# Altium PCB External_GPS.PcbDoc
Units mm, origin at the board's own origin, x right, y up, seen from the top; angles counter-clockwise.
Board outline 77 x 70 mm, 2 copper layers (Top Layer, Bottom Layer); 33 components, 15 nets, 147 pads, 22 vias.
Unrouted connection lines stored in the file: 34.
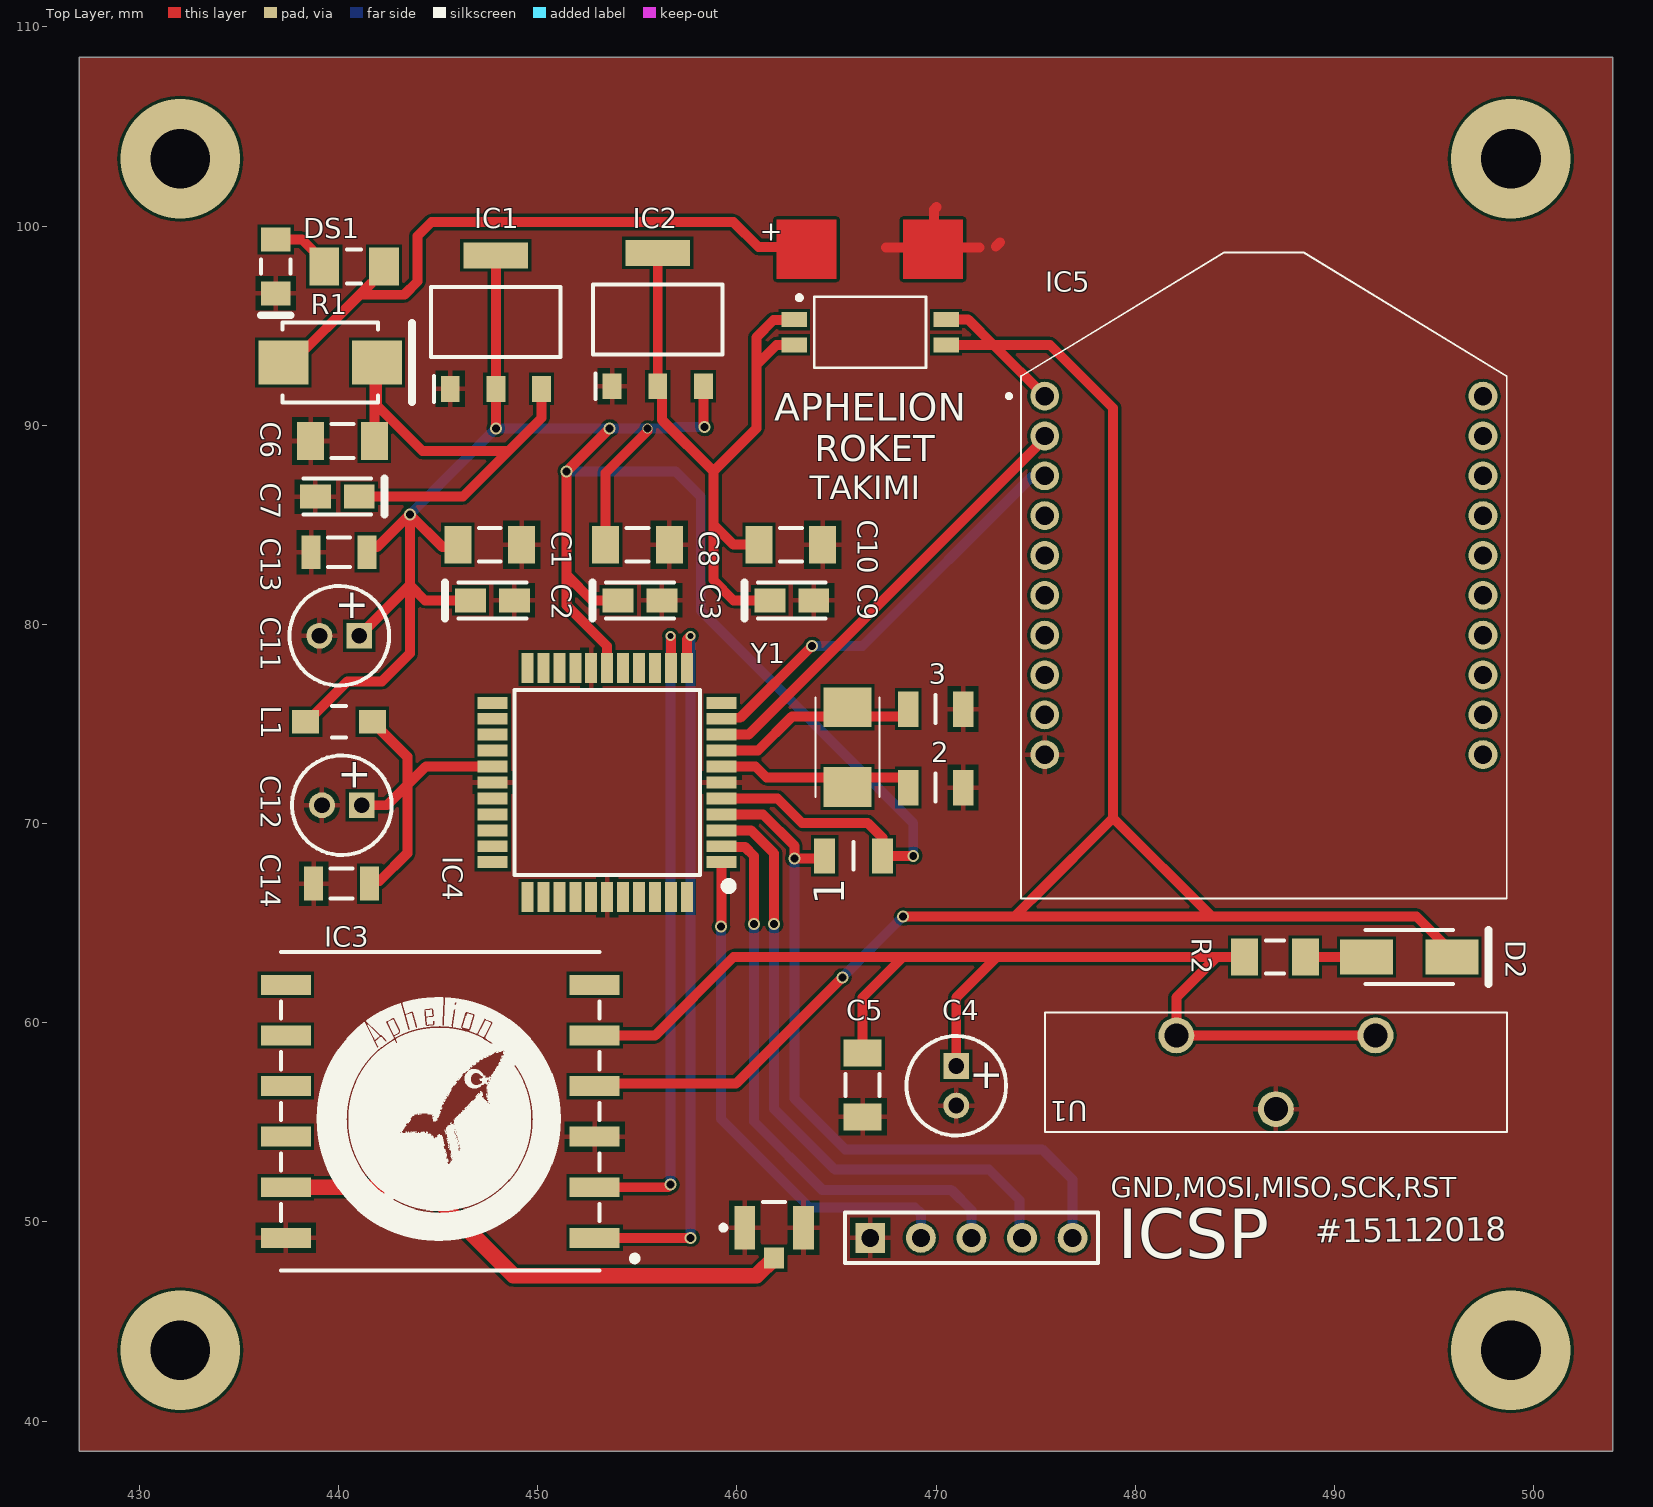
[diagram p0: Top Layer view]
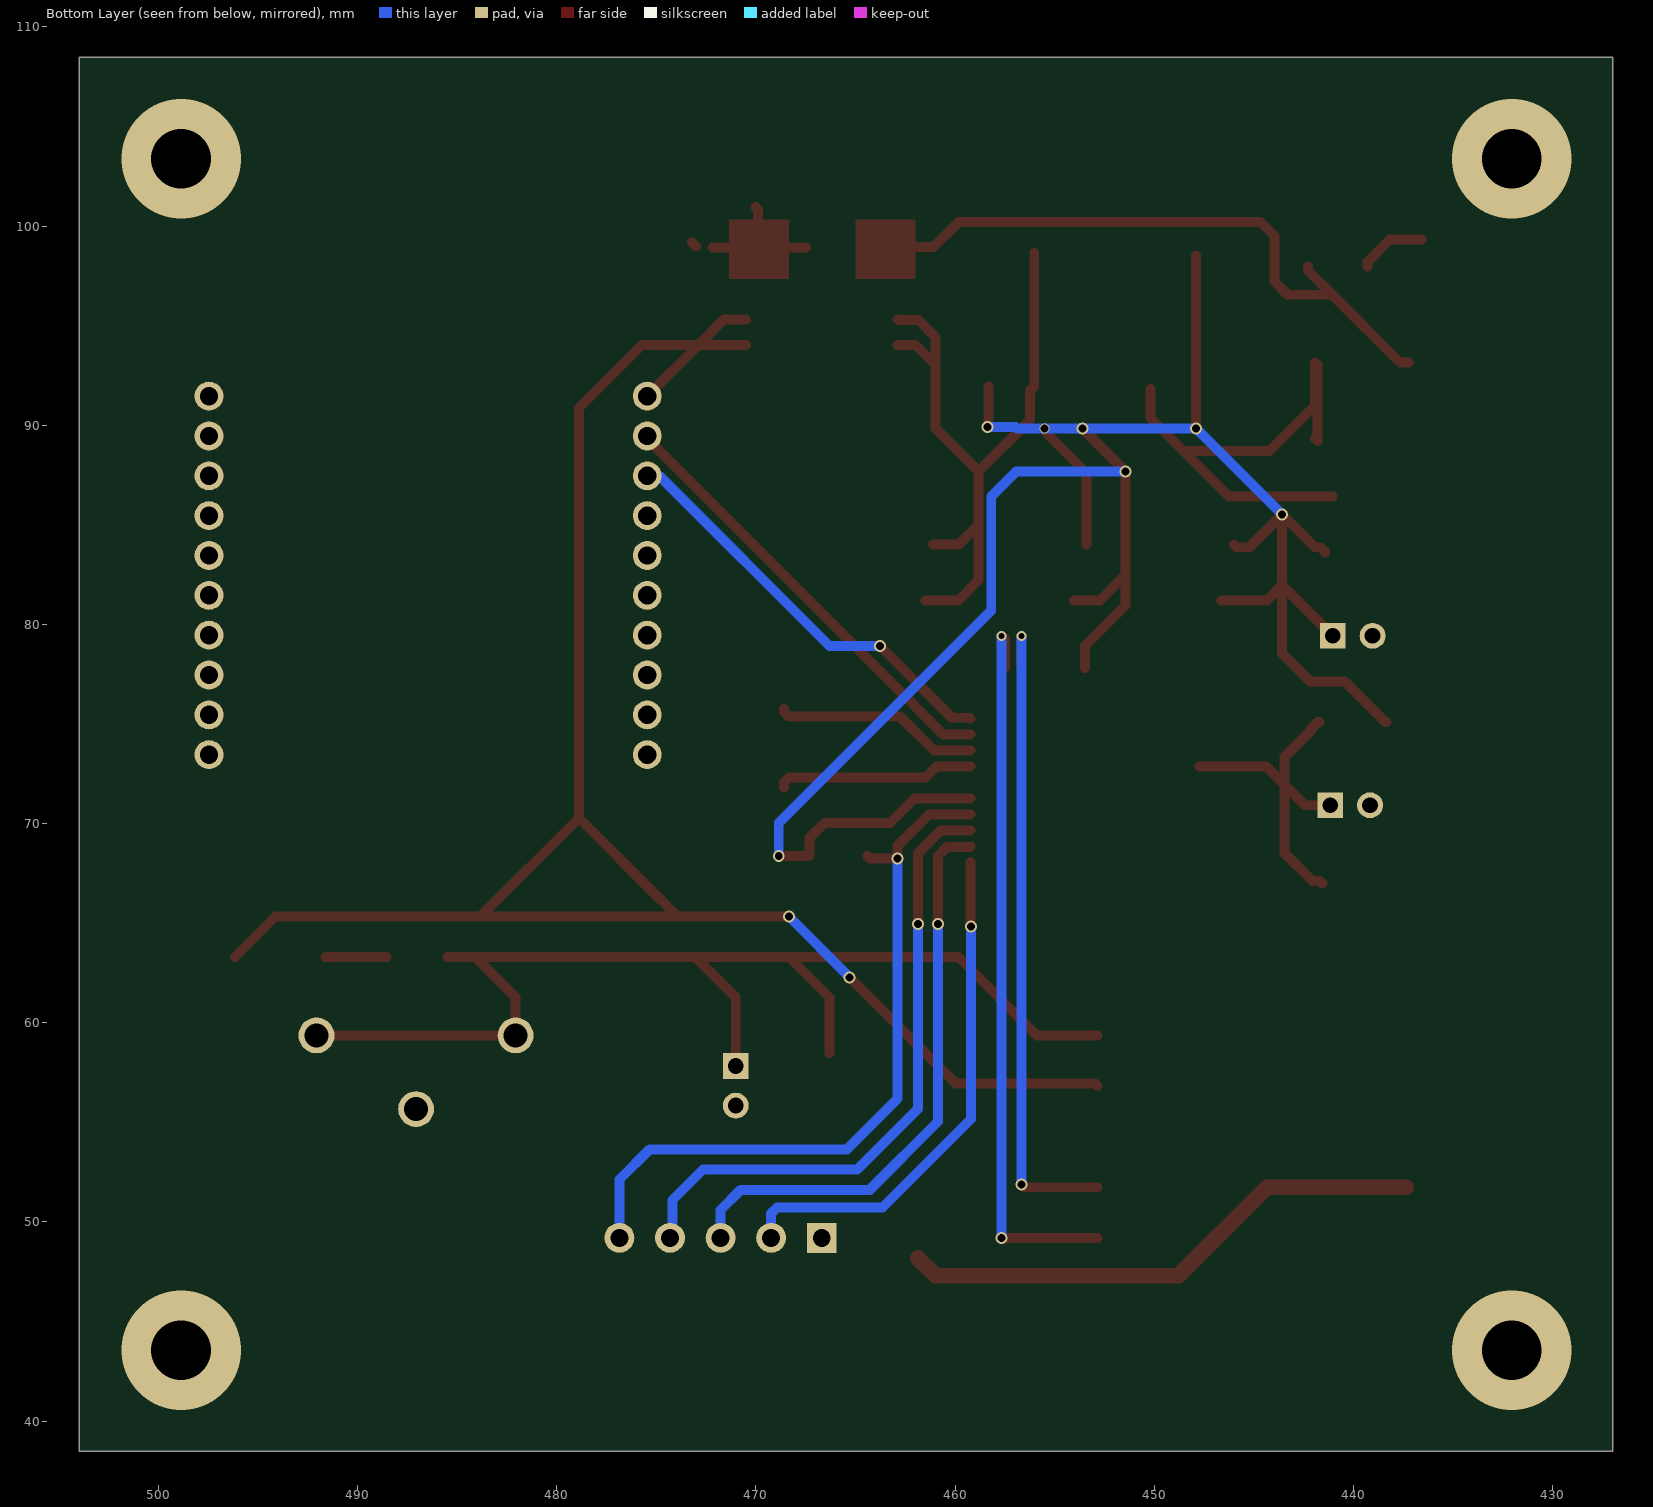
[diagram p1: Bottom Layer view, seen from below]
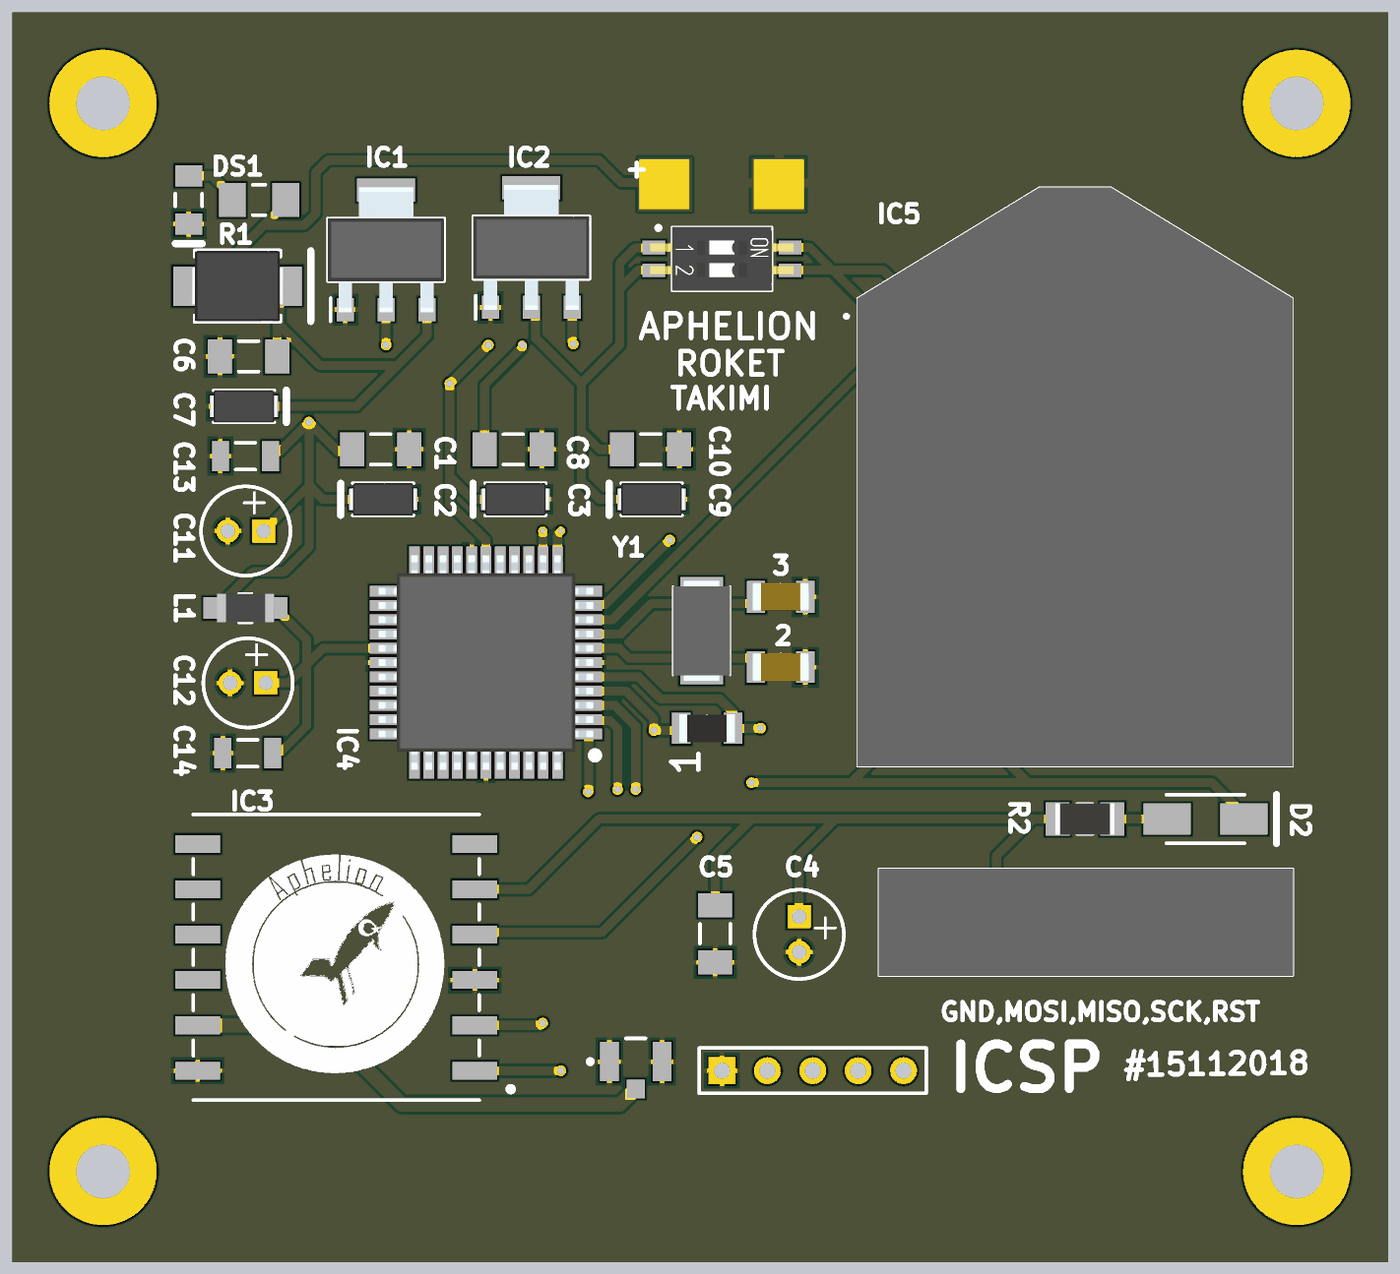
[diagram p2: 3D render of the assembled board from above, using the file's embedded part models]

## Layer stack, top to bottom
Top Solder: solder mask 0.0102, Solder Resist, Dk 3.5
Top Layer: signal copper 0.0356
Dielectric 1: dielectric 0.32, FR-4, Dk 4.8
Bottom Layer: signal copper 0.0356
Bottom Solder: solder mask 0.0102, Solder Resist, Dk 3.5

## Board outline
426.974,38.481 426.974,108.481 503.974,108.481 503.974,38.481

## Design rules (kind name [scope] priority, off if disabled: settings)
Clearance [All] p1: gap=0.15 ignorepadtopadclearanceinfootprint=FALSE
PolygonConnect [All] p1: connectstyle=Relief reliefconductorwidth=0.254 reliefentries=4 polygonreliefangle="90 Angle" airgapwidth=0.254
RoutingVias [All] p1: holewidth=0.711 width=1.27 viastyle="Through Hole" minholewidth=0.711 minwidth=1.27 maxholewidth=0.711 maxwidth=1.27
SolderMaskExpansion [All] p1: expansion=0.102 istentingtop=FALSE
Width [All] p1: maxlimit=50 minlimit=0.1 preferedwidth=0.254 minimp=50.000000 maximp=50.000000 favimp=50.000000
30 further rules are at their usual default settings.

## Classes and differential pairs
component class Sheet2: 1 2 3 C1 C2 C3 C4 C5 C6 C7 C8 C9 C10 C11 C12 C13 C14 D2 DS1 IC1 IC2 IC3 IC4 IC5 L1 R1 R2 U1 Y1

## Components (designator, comment, footprint, x,y, rotation, side; value= is the part's Value field where it differs from the comment)
1 "" RESC3116X65N 465.855,68.382 r180 top
2 "C17_22pF" CAPC3216X100N 469.976,71.811 r0 top
3 "C18_22pF" CAPC3216X100N 469.976,75.748 r0 top
C1 "100N" CAPC1206(3216)190_M 447.59,84.003 r0 top value=100nF
C2 "22uF" AVX-TAJ-A-2_L 447.725,81.209 r0 top
C3 "22uF" AVX-TAJ-A-2_L 455.134,81.209 r0 top
C4 "10uF" CAPPR55-200-1100X500X1200 471.009,56.841 r270 top
C5 "CAP 100nF" CAPC1206(3216)190_M 466.31,56.876 r90 top value=100nF
C6 "100N" CAPC1206(3216)190_M 440.199,89.21 r0 top value=100nF
C7 "22uF" AVX-TAJ-A-2_L 439.937,86.416 r180 top
C8 "100N" CAPC1206(3216)190_M 455.007,84.003 r180 top value=100nF
C9 "22uF" AVX-TAJ-A-2_L 462.754,81.209 r0 top
C10 "100N" CAPC1206(3216)190_M 462.703,84.003 r180 top value=100nF
C11 "10uF" CAPPR55-200-1100X500X1200 440.037,79.431 r180 top
C12 "10uF" CAPPR55-200-1100X500X1200 440.164,70.922 r180 top
C13 "100N" CAPC1206(3216)190_L 440.024,83.622 r0 top value=100nF
C14 "100N" CAPC1206(3216)190_L 440.151,66.985 r0 top value=100nF
D2 "SS14" FAIR-DO-214AC-2_V 493.751,63.302 r0 top
DS1 "1206_LED" LUMX-SML-LX1206YC-TR_V 436.846,97.973 r270 top
IC1 "AMS1117-5.0" SOT229P700X180-4N 447.895,95.179 r90 top
IC2 "ams1117-3.3v" SOT229P700X180-4N 456.023,95.306 r90 top
IC3 "L80-M39" L80-M39 437.354,60.635 r0 top
IC4 "ATMEGA32-16AU" QFP80P1200X1200X120-44N 453.483,72.065 r180 top
IC5 "XBP24CZ7WIT-004" XBP24CZ7WIT004 475.454,91.462 r0 top
L1 "742792111" SMD-1206 440.021,75.113 r0 top
R1 "10K" RESC3216X70X50ML20T25 440.783,97.973 r0 top
R2 "1K" RESC3216X60X45ML15T20 487.011,63.302 r0 top
U1 "KLS5-CR2032-04" KLS5CR203204 482.058,59.365 r0 top
Y1 "16MHZ" NX5032GA16MHZSTDCSK4 465.548,73.843 r270 top
? "Comment" HRS-U.FL-R-SMT-1(10)_V 461.865,49.714 r0 top
? "Comment" HDR1X5 466.691,49.205 r0 top
? "Comment" 416131160802 466.691,94.671 r270 top
? "Comment" FAIR-DO-214AA-2_V 439.577,93.147 r0 top

## Footprints (in the part's own frame and the unit in brackets; to place one, negate y for a bottom-side part, rotate by r counter-clockwise, add the part's x,y. Pads: shape width x height; smd on the part's side, far side on the other; paste and mask are expansions set on the pad)
416131160802 [mm] "02p, 1.27mm Pitch, Horizontal, HP Type, SMT, flat Actuator, black, with Tape, T&R"
  rect 0.76x1.27 smd: 1(-0.635,-3.81) 2(0.635,-3.81) 3(0.635,3.81) 4(-0.635,3.81)
  silkscreen extent -1.83,-3.66 1.79,2.8, body extent -1.79,-4 1.79,4, height 2.06
AVX-TAJ-A-2_L [mm] "Molded Capacitor, 2-Leads, Body 3.4x1.8mm, IPC High Density"
  rect 1.55x1.2 smd: 1(-1.1,0) 2(1.1,0)
  silkscreen extent -2.37,-0.9 1.7,0.9, body extent -1.92,-0.9 1.92,0.9, height 1.8
CAPC1206(3216)190_L [mm] "Chip Capacitor, Body 3.2x1.6mm, Height 1.9mm, IPC High Density"
  rect 0.95x1.7 smd: 1(-1.4,0) 2(1.4,0)
  silkscreen extent -0.55,-0.75 0.55,0.75, body extent -1.7,-0.9 1.7,0.9, height 1.9
CAPC1206(3216)190_M [mm] "Chip Capacitor, Body 3.2x1.6mm, Height 1.9mm, IPC Low Density"
  rect 1.35x1.9 smd: 1(-1.6,0) 2(1.6,0)
  silkscreen extent -0.55,-0.85 0.55,0.85, body extent -1.7,-0.9 1.7,0.9, height 1.9
CAPC3216X100N [mm]
  rect 1.02x1.78 smd: 1(-1.38,0) 2(1.38,0)
  silkscreen extent 0,-0.7 0,0.7, body extent -1.6,-0.8 1.6,0.8, height 1
CAPPR55-200-1100X500X1200 [mm] "THD, 2-Leads, Dia 5mm, Body Length 11mm"
  rect 1.3x1.3 hole 0.8: 1(-1,0)
  round 1.3 hole 0.8: 2(1,0)
  silkscreen extent -2.5,-2.5 2.5,2.5, body extent -2.5,-2.5 2.5,2.5, height 12
FAIR-DO-214AA-2_V [mm] "Molded Diode, 2-Leads, Body 4.75x3.95mm"
  rect 2.5x2.2 smd: 1(-2.35,0) 2(2.35,0)
  silkscreen extent -2.4,-2 4.1,2, body extent -2.59,-1.97 2.6,1.98, height 2.65
FAIR-DO-214AC-2_V [mm] "DO-214, 2-Leads, Body 4.375x2.725mm"
  rect 2.65x1.75 smd: 1(-2.15,0) 2(2.15,0)
  silkscreen extent -2.19,-1.36 3.98,1.36, body extent -2.19,-1.36 2.19,1.36, height 2.5
HDR1X5 [mm] "Connector; Header; 5 Position"
  rect 1.5x1.5 hole 0.9: 1(0,0)
  round 1.5 hole 0.9: 2(2.54,0) 3(5.08,0) 4(7.62,0) 5(10.16,0)
  silkscreen extent -1.27,-1.27 11.43,1.27
HRS-U.FL-R-SMT-1(10)_V [mm] "SMD, 3-Leads, Body 2.6x2.6mm"
  rect 1.05x2.2 smd: 1(-1.475,0) 2(1.475,0)
  rect 1x1.05 smd: 3(0,-1.525)
  silkscreen extent -2.67,-0.12 0.55,1.3, body extent -1.3,-1.3 1.3,1.3, height 1.25
KLS5CR203204 [mm]
  round 1.8 hole 1.2: 1(0,0) 2(10,0) 3(5,-3.7)
  silkscreen extent -6.6,-4.85 16.6,1.15, body extent -6.6,-4.85 16.6,1.15, height 18.13
L80-M39 [mm]
  rect 2.5x1 smd: 1(15.5,-11.43) 2(15.5,-8.89) 3(15.5,-6.35) 4(15.5,-3.81) 5(15.5,-1.27) 6(15.5,1.27) 7(0,1.27) 8(0,-1.27) 9(0,-3.81) 10(0,-6.35) 11(0,-8.89) 12(0,-11.43)
  silkscreen extent -0.25,-13.08 17.65,2.92
LUMX-SML-LX1206YC-TR_V [mm] "SMD, 2-Leads, Body 3.2x1.5mm"
  rect 1.2x1.5 smd: 1(-1.35,0) 2(1.35,0)
  silkscreen extent -0.35,-0.75 2.45,0.75, body extent -1.6,-0.75 1.6,0.75, height 1.25
NX5032GA16MHZSTDCSK4 [mm]
  rect 2x2.4 smd: 1(-2,0) 2(2,0)
  silkscreen extent -2.5,-1.6 2.5,1.6, body extent -2.8,-1.6 2.8,1.6, height 1.6
QFP80P1200X1200X120-44N [mm]
  rect 1.5x0.6 smd: 1(-5.75,4) 2(-5.75,3.2) 3(-5.75,2.4) 4(-5.75,1.6) 5(-5.75,0.8) 6(-5.75,0) 7(-5.75,-0.8) 8(-5.75,-1.6) 9(-5.75,-2.4) 10(-5.75,-3.2) 11(-5.75,-4) 23(5.75,-4) 24(5.75,-3.2) 25(5.75,-2.4) 26(5.75,-1.6) 27(5.75,-0.8) 28(5.75,0) 29(5.75,0.8) 30(5.75,1.6) 31(5.75,2.4) 32(5.75,3.2) 33(5.75,4)
  rect 0.6x1.5 smd: 12(-4,-5.75) 13(-3.2,-5.75) 14(-2.4,-5.75) 15(-1.6,-5.75) 16(-0.8,-5.75) 17(0,-5.75) 18(0.8,-5.75) 19(1.6,-5.75) 20(2.4,-5.75) 21(3.2,-5.75) 22(4,-5.75) 34(4,5.75) 35(3.2,5.75) 36(2.4,5.75) 37(1.6,5.75) 38(0.8,5.75) 39(0,5.75) 40(-0.8,5.75) 41(-1.6,5.75) 42(-2.4,5.75) 43(-3.2,5.75) 44(-4,5.75)
  silkscreen extent -6.3,-4.65 4.65,5.4, body extent -6,-6 6,6, height 1.2
RESC3116X65N [mm]
  rect 1.05x1.75 smd: 1(-1.45,0) 2(1.45,0)
  silkscreen extent 0,-0.69 0,0.69, body extent -1.55,-0.79 1.55,0.79, height 0.65
RESC3216X60X45ML15T20 [mm] "Chip Resistor, 2-Leads, Body 3.3x1.75mm, IPC Low Density"
  rect 1.35x1.85 smd: 1(-1.525,0) 2(1.525,0)
  silkscreen extent -0.45,-0.82 0.45,0.82, body extent -1.65,-0.87 1.65,0.87, height 0.6
RESC3216X70X50ML20T25 [mm] "Chip Resistor, 2-Leads, Body 3.20x1.60mm, IPC Low Density"
  rect 1.5x1.9 smd: 1(-1.5,0) 2(1.5,0)
  silkscreen extent -0.35,-0.85 0.35,0.85, body extent -1.7,-0.9 1.7,0.9, height 0.7
SMD-1206 [mm] "Chip Inductor, 2-Leads, Body 3.2x1.6mm"
  rect 1.35x1.2 smd: 1(-1.675,0) 2(1.675,0)
  silkscreen extent -0.35,-0.8 0.35,0.8, body extent -1.6,-0.8 1.6,0.8, height 1.09
SOT229P700X180-4N [mm]
  rect 1.3x0.95 smd: 1(-3.35,2.29) 2(-3.35,0) 3(-3.35,-2.29)
  rect 1.3x3.25 smd: 4(3.35,0)
  silkscreen extent -4,-3.25 1.75,3.25, body extent -3.5,-3.25 3.5,3.25, height 1.8
XBP24CZ7WIT004 [mm]
  round 1.45 hole 0.92: 1(0,0) 2(0,-2) 3(0,-4) 4(0,-6) 5(0,-8) 6(0,-10) 7(0,-12) 8(0,-14) 9(0,-16) 10(0,-18) 11(22,-18) 12(22,-16) 13(22,-14) 14(22,-12) 15(22,-10) 16(22,-8) 17(22,-6) 18(22,-4) 19(22,-2) 20(22,0)
  silkscreen extent -1.9,-25.21 23.19,7.21, body extent -1.19,-25.21 23.19,7.21, height 2.79

## Part data
1: library part MC1206S4F5600T5E, "Resistor", Manufacturer_Name=MULTICOMP, Datasheet Link=http://www.newark.com/pdfs/datasheets/spc/TA-677.pdf?_ga=1.248182791.1411154270.1472651675, Height=0.65mm, Manufacturer_Part_Number=MC1206S4F5600T5E
2 3: library part CL31B104KBCNNNC, "Capacitor", Manufacturer_Name="Samsung Electro-Mechanics", RS Part Number=7666947, Datasheet Link=http://www.samsungsem.com/kr/support/product-search/mlcc/CL31B104KBCNNNC.jsp, Height=1mm, Manufacturer_Part_Number=CL31B104KBCNNNC, RS Price/Stock=http://uk.rs-online.com/web/p/products/7666947
C1 C5 C6 C8 C10: library part CMP-1037-04189-1, "CAP 100nF 25V ±5% 1206 (3216 Metric) Thickness 1.9mm SMD", Case-EIA=1206, Case-Metric=3216, Rated Voltage="25 V", Tolerance=Â±5%, Max Thickness="1.9 mm", Technology=SMT
C2 C3 C7 C9: library part CMP-2000-07524-1, "Chip Capacitor, 22 uF, +/- 10%, 10 V, -55 to 125 degC, 1206 (3216 Metric), RoHS, Tape and Reel", Case Code (Metric)=3216, Case Code (Imperial)=1206, Dielectric Material=Tantalum, ESR (Equivalent Series Resistance)=3Ohm, Leakage Current=2.2uA, Manufacturer=AVX, Max Operating Temperature=125degC, Min Operating Temperature=-55degC, Package Description="2-Pin Surface Mount Device, Body 3.2 x 1.65 mm", Package Quantity=1, Package Reference=TAJ-A-2, Tolerance=10%, Voltage=10V, Capacitance=22uF, Case/Package=1206, Datasheet URL=http://datasheets.avx.com/TAJ.pdf, Datasheet Version=09/2017, Depth=1.6mm, Dissipation Factor=8%, Height=1.6mm, Height - Seated (Max)=0.071inch, Lead Free=LeadFree, Lead Pitch=1.1mm, Length=3.2mm, Manufacturer URL=http://www.avx.com/, Mount=PCB, Mounting Technology=SurfaceMount, Number of Pins=2, Packaging=TapeandReel, Polarity=Polar, Radiation Hardening=No, REACH SVHC=NoSVHC, RoHSCompliant=True, Termination=SMD/SMT, Voltage Rating=10V, Voltage Rating (DC)=10V, Width=1.6mm
C4 C11 C12: library part CMP-2100-03622-1, "Aluminum Electrolytic Capacitor, 10 uF, +/- 20%, 50 V, -40 to 85 degC, 2-Pin THD, RoHS, Bulk", Case/Package=Radial, Dielectric Material=Aluminium, Leakage Current=3uA, Manufacturer=Panasonic, Max Operating Temperature=85degC, Min Operating Temperature=-40degC, Package Description="2-Pin Radial Lead, Dia 5 mm, Height 12 mm", Package Quantity=200, Package Reference=CAPPR55-200-1100X500X1200, Ripple Current=65mA, Tolerance=20%, Voltage=50V, Capacitance=10uF, Datasheet URL=https://industrial.panasonic.com/cdbs/www-data/pdf/RDF0000/ABA0000C1218.pdf, Datasheet Version="Rev. 05, 10/2016", Diameter=5mm, Dissipation Factor=0.12%, Height=11mm, Height - Seated (Max)=0.472inch, Lead Diameter=0.5mm, Lead Free=LeadFree, Lead Pitch=2mm, Lead/Base Style=Straight, Length=11mm, Life (Hours)=2000Hour, Manufacturer URL=http://www.panasonic.com/, Mount=ThroughHole, Number of Pins=2, Packaging=Bulk, Radiation Hardening=No, REACH SVHC=NoSVHC, Ripple Current (AC)=65mA, RoHSCompliant=true, Termination=Radial, Voltage Rating=50V, Voltage Rating (DC)=50V
C13 C14: library part CMP-1037-04186-1, "CAP 100nF 25V ±1% 1206 (3216 Metric) Thickness 1.9mm SMD", Case-EIA=1206, Case-Metric=3216, Rated Voltage="25 V", Tolerance=Â±1%, Max Thickness="1.9 mm", Technology=SMT
D2: library part CMP-2000-04943-1, "Schottky Rectifier, 1.1 W, -65 to 125 degC, 2-Pin SMD, RoHS, Tape and Reel", Average Forward Current-Max (A)=1, Manufacturer=Fairchild, Package Body Material=PLASTIC/EPOXY, Package Description="2-Pin Surface Mount Device, Body 4.375 x 2.725 mm", Package Reference=DO-214AC-2, Package Shape=RECTANGULAR, Package Style=SMALLOUTLINE, Peak Reflow Temperature (Cel)=260, Power Dissipation Limit-Max (W)=1.1, Rep Pk Reverse Voltage-Max (V)=40, Additional Feature=FREEWHEELINGDIODE, CAGE Code=1HBD3,07933,59621,7D893, Configuration=SINGLE, Datasheet URL=http://www.onlinecomponents.com/datasheet/ss14.aspx?p=11369800, Datasheet Version=Oct-13, Diode Element Material=SILICON, JEDEC-95 Code=DO-214AC, JESD-30 Code=R-PDSO-C2, JESD-97 Code=e3, Lead Free=YES, Manufacturer URL=https://www.fairchildsemi.com/, Moisture Sensitivity Level=1, Number of Elements=1, Number of Terminals=2, Package URL=https://www.fairchildsemi.com/package-drawings/DO/DO214AC.pdf, RoHS Compliant=YES, Signal Diode Type=SIGNALDIODE, Surface Mount=YES, Technology=SCHOTTKY, Terminal Finish=MATTETIN, Terminal Form=CBEND, Terminal Position=DUAL
DS1: library part CMP-2000-07124-1, "Yellow LED, Water Clear Len, 585 nm, 2.1 V, -40 to 85 degC, 2-Pin SMD, RoHS, Tape and Reel", Color=Yellow, Current - Test=20mA, Lens Color=Colorless, Manufacturer=Lumex, Millicandela Rating=6mcd, Package / Case=1206(3216Metric), Package Description="2-Pin Surface Mount Device, Body 3.2 x 1.5 mm", Package Reference=SML-LX1206YC-TR, Standard Package=3,000, Supplier Device Package=1206, Voltage - Forward (Vf) (Typ)=2.1V, Catalog Drawings=SML-LX1206SeriesTopSML-LX1206SeriesSideSML-LX1206SeriesBottomSML-LX1206SeriesFootprint, Category=Optoelectronics, Datasheet URL=http://www.lumex.com/content/files/ProductAttachment/SML-LX1206YC-TR.pdf, Datasheet Version="Rev. K, 08/2012", Family=LEDIndication-Discrete, Features=-, Height (Max)=1.10mm, Lens Style/Size=RectanglewithFlatTop, Lens Transparency=Clear, Manufacturer URL=http://www.lumexinstruments.com/, Mounting Technology=SurfaceMount, Mounting Type=SurfaceMount, Online Catalog=SML-LX1206RectanglewithFlatTop1206PackageLEDs, Other Names=67-1358-2LU60357TRSMLLX1206YCTR, Packaging=Tape&Reel(TR), Product Training Modules=LEDsBenefitsofCustomLEDandLCDTechnology, RoHS Information=RoHSCertofCompliance, Series=-, Size / Dimension=3.20mmLx1.60mmW, Viewing Angle=160°, Wavelength - Dominant=-, Wavelength - Peak=585nm
IC1 IC2: "Integrated Circuit", Manufacturer_Name="Advanced Monolithic Systems", Datasheet Link=http://www.advanced-monolithic.com/pdf/ds1117.pdf, Height=1.8mm
  IC1: Manufacturer_Part_Number=AMS1117-5.0
  IC2: Manufacturer_Part_Number=ams1117-3.3v
IC3: "Integrated Circuit", Manufacturer_Name=Quectel, RS Part Number=9084088, Datasheet Link=http://docs-emea.rs-online.com/webdocs/147d/0900766b8147dbf2.pdf, Manufacturer_Part_Number=L80-M39, RS Price/Stock=http://uk.rs-online.com/web/p/products/9084088
IC4: "Integrated Circuit", Manufacturer_Name=Microchip, Mouser Part Number=556-ATMEGA32-16AU, RS Part Number=6281485P, Datasheet Link=http://docs-emea.rs-online.com/webdocs/091f/0900766b8091f466.pdf, Height=1.2mm, Manufacturer_Part_Number=ATMEGA32-16AU, Mouser Price/Stock=https://www.mouser.com/Search/Refine.aspx?Keyword=556-ATMEGA32-16AU, RS Price/Stock=http://uk.rs-online.com/web/p/products/6281485P
IC5: "Integrated Circuit", Manufacturer_Name="Digi International", Mouser Part Number=888-XBP24CZ7WIT-004, RS Part Number=1359739, Datasheet Link=https://componentsearchengine.com/Datasheets/1/XBP24CZ7WIT-004.pdf, Height=2.79mm, Manufacturer_Part_Number=XBP24CZ7WIT-004, Mouser Price/Stock=https://www.mouser.com/Search/Refine.aspx?Keyword=888-XBP24CZ7WIT-004, RS Price/Stock=http://uk.rs-online.com/web/p/products/1359739
L1: library part CMP-0220-00024-1, "SMD EMI Suppression Ferrite Bead WE-CBF, Z = 26 Ohm", ComponentLink1Description="Manufacturer Link", ComponentLink1URL=http://www.we-online.com, ComponentLink2Description=Datasheet, ComponentLink2URL=http://www.we-online.de/katalog/media/pdf/742792111.pdf, DatasheetVersion=Dec-2005, PackageDescription="Chip Inductor, 2-Leads, Body 3.2 x 1.6 mm", PackageReference=SMD-1206, PackageVersion=2007, Impedance="26 Ohm"
R1: library part CMP-2003-04438-1, Manufacturer=Panasonic, Part Number=ERA8AEB221V
R2: library part CMP-2100-03616-1, "Chip Resistor, 1 KOhm, +/- 1%, 0.25 W, -55 to 155 degC, 1206 (3216 Metric), RoHS, Tape and Reel", Case Code (Metric)=3216, Case Code (Imperial)=1206, Manufacturer="Vishay Semiconductor", Max Operating Temperature=155degC, Max Power Dissipation=250mW, Min Operating Temperature=-55degC, Package Description="2-Pin Surface Mount Device, Body 3.15 x 1.6 mm", Package Quantity=10, Package Reference=1206.0, Resistance=1KOhm, Temperature Coefficient=100ppm/degreesC, Tolerance=1%, Voltage Rating=200V, Case/Package=1206, Composition=ThickFilm, Contact Plating=Tin, Datasheet URL=http://www.farnell.com/datasheets/1720486.pdf, Datasheet Version=41061.0, Depth=1.6mm, Height=0.55mm, Lead Free=LeadFree, Length=3.2mm, Manufacturer URL=http://www.vishay.com/, Military Standard=Not, Mount=SurfaceMount, Number of Pins=2, Number of Terminations=2, Packaging=TapeandReel, Power Rating=250mW, Radiation Hardening=No, REACH SVHC=Unknown, RoHSCompliant=true, Termination=SMD/SMT, Voltage Rating (DC)=200V, Weight=0.000353oz, Width=0.063inch
U1: "Undefined or Miscellaneous", Manufacturer_Name="KLS Electronic", Datasheet Link=http://www.klsele.com/admin/product_upload/20151124101114KLS5-CR2032-04.pdf, Height=18.13mm, Manufacturer_Part_Number=KLS5-CR2032-04
Y1: library part NX5032GA-16MHZ-STD-CSK-4, "Crystal or Oscillator", Manufacturer_Name=NDK, Datasheet Link=http://www.ndk.com/images/products/catalog/c_NX5032GA_e.pdf, Height=1.5mm, Manufacturer_Part_Number=NX5032GA-16MHZ-STD-CSK-4

## Via types
v1: diameter 0.6, hole 0.4, Top Layer to Bottom Layer, 15 vias
v2: diameter 6, hole 3, Top Layer to Bottom Layer, 4 vias
v3: diameter 0.5, hole 0.3, Top Layer to Bottom Layer, 2 vias
v4: diameter 0.5, hole 0.4, Top Layer to Bottom Layer, 1 vias

## Nets (pads, with @x,y where several pads share a name; then routed paths per layer and width w, separated by ;. In a path a pad name is that pad's centre, name@x,y a point inside that pad or via, vN(x,y) a via of type N, cw(c..) or ccw(c..) an arc to the next point about the centre after c; other vN are vias at no path point)
+3.3V: ?.1@462.881,95.306 ?.2@462.881,94.036 ?.3@470.501,94.036 ?.4@470.501,95.306 C9.1 C10.2 D2.2 IC2.2 IC2.4 IC3.4 IC5.1 | length 54.6
  Top Layer w0.5: IC3.4 452.981,56.952 459.96,56.952 v1(465.294,62.286) ; IC2.4 IC2.2 456.248,91.731 456.248,90.255 458.817,87.686 ; C10.2 459.833,84.003 458.817,85.019 ; C9.1@461.479,81.209 459.833,81.209 458.817,82.225 458.817,85.019 ; ?.2@462.881,94.036 461.992,94.036 460.976,93.02 ; ?.1@462.881,95.306 462.851,95.276 461.835,95.276 460.976,94.417 460.976,93.02 ; 458.817,85.019 458.817,87.686 ; 458.817,87.686 460.976,89.845 460.976,93.02
  Bottom Layer w0.5: v1(465.294,62.286) v1(468.342,65.334)
+5V: 1.1 C1.1 C2.1 C3.1 C8.2 C11.1 C13.2 IC1.2 IC1.4 IC2.3 IC4.5 IC4.17 L1.1 | length 118.6
  Top Layer w0.5: L1.1 438.421,75.113 440.453,77.145 442.18,77.145 443.577,78.542 443.577,81.971 ; C11.1 443.577,81.971 ; C13.2 441.424,83.651 441.649,83.876 441.926,83.876 v1(443.577,85.527) ; C1.1 445.863,83.876 445.228,83.876 v1(443.577,85.527) ; C2.1 444.339,81.209 443.577,81.971 ; v1(447.895,89.845) IC1.2 IC1.4 ; C8.2 453.407,87.61 455.515,89.718 v4(455.515,89.845) ; IC4.17 453.483,78.923 451.451,80.955 451.451,82.479 ; v1(453.61,89.845) v1(451.451,87.686) 451.451,82.479 ; C3.1 452.721,81.209 451.451,82.479 ; IC2.3 458.311,91.954 458.311,89.97 v1(458.373,89.907) ; IC4.5 462.03,71.265 463.262,70.033 466.564,70.033 467.305,69.292 1.1 v1(468.85,68.382) ; 443.577,81.971 v1(443.577,85.527)
  Bottom Layer w0.5: v1(443.577,85.527) v1(447.895,89.845) v1@453.456,89.845 ; v1(451.451,87.686) 456.912,87.686 458.182,86.416 458.182,80.701 468.85,70.033 v1(468.85,68.382) ; v1@453.564,89.845 v1(453.61,89.845) v4(455.515,89.845) 456.899,89.845 456.962,89.907 v1(458.373,89.907)
+7.4V: ?.1@437.227,93.147 R1.2 | length 33.1
  Top Layer w0.5: ?.1@437.227,93.147 437.657,93.147 441.061,96.551 ; R1.2 442.283,97.773 441.061,96.551 ; 459.792,100.203 444.664,100.203 443.958,99.497 443.958,97.211 443.298,96.551 441.061,96.551 ; 459.817,100.203 461.076,98.944 463.688,98.944
AVCC: C12.1 C14.2 IC4.27 L1.2 | length 17.3
  Top Layer w0.5: C12.1 442.434,70.922 443.45,71.938 ; C14.2 441.678,67.112 442.053,67.112 443.45,68.509 443.45,71.938 ; L1.2 441.771,75.113 442.121,74.763 442.121,74.688 443.45,73.359 443.45,71.938 ; IC4.27 444.377,72.865 443.45,71.938
GND: 2.2 3.2 ?.1@460.39,49.714 ?.1@466.691,49.205 ?.2@463.34,49.714 C1.2 C2.2 C3.2 C4.2 C5.1 C6.1 C7.2 C8.1 C9.2 C10.1 C11.2 C12.2 C13.1 C14.1 DS1.2 IC1.1 IC2.1 IC3.3 IC3.12 IC4.6 IC4.18 IC4.28 IC4.39 IC5.10 U1.3 | length 5.9
  Top Layer w0.5: 467.487,98.933 472.186,98.933 ; 469.9,100.076 469.9,100.838 470.027,100.965 ; 472.991,98.976 473.202,99.187
Net1_2: 1.2 IC4.4 | length 37.2
  Top Layer w0.5: IC4.4 461.306,70.465 462.881,68.89 v1(462.881,68.255) 464.278,68.255 1.2
  Bottom Layer w0.5: v1(462.881,68.255) 462.881,56.19 465.421,53.65 475.327,53.65 476.851,52.126 476.851,49.205
Net2_1: 2.1 IC4.7 Y1.2 | length 9.9
  Top Layer w0.5: IC4.7 460.938,72.865 461.484,72.319 468.336,72.319 468.596,72.059 2.1
Net3_1: 3.1 IC4.8 Y1.1 | length 10.3
  Top Layer w0.5: IC4.8 461.052,73.665 462.754,75.367 468.336,75.367 468.596,75.627 3.1
NetC4_1: C4.1 C5.2 IC3.5 R2.1 U1.1 U1.2 | length 61
  Top Layer w0.5: IC3.5 455.896,59.365 459.833,63.302 468.342,63.302 ; C5.2 466.31,61.27 468.342,63.302 ; C4.1 471.009,61.27 473.041,63.302 ; R2.1 484.09,63.302 ; U1.2 U1.1 482.058,61.27 484.09,63.302 ; 468.342,63.302 473.041,63.302 ; 473.041,63.302 484.09,63.302
NetC6_2: ?.2@441.927,93.147 C6.2 C7.1 IC1.3 | length 26
  Top Layer w0.5: C7.1 446.244,86.416 448.53,88.702 ; C6.2 441.799,93.019 441.927,93.147 441.927,90.987 444.212,88.702 448.53,88.702 ; IC1.3 450.185,90.357 448.53,88.702
NetD2_1: D2.1 R2.2 | length 3.1
  Top Layer w0.5: R2.2 D2.1
NetIC3_1: IC3.1 IC4.12 | length 36.7
  Top Layer w0.5: IC3.1 v1(457.674,49.205) ; IC4.12 457.483,79.24 v3(457.674,79.431)
  Bottom Layer w0.5: v1(457.674,49.205) v3(457.674,79.431)
NetIC3_2: IC3.2 IC4.13 | length 33
  Top Layer w0.5: IC3.2 456.531,51.745 v1(456.658,51.872) ; v3(456.658,79.431) 456.683,79.406 IC4.13
  Bottom Layer w0.5: v1(456.658,51.872) v3(456.658,79.431)
NetIC5_2: IC5.2
NetIC5_3: IC5.3
pads on no net: ?.2@469.231,49.205 ?.3@461.865,48.189 ?.3@471.771,49.205 ?.4@474.311,49.205 ?.5 DS1.1 IC3.6 IC3.7 IC3.8 IC3.9 IC3.10 IC3.11 IC4.1 IC4.2 IC4.3 IC4.9 IC4.10 IC4.11 IC4.14 IC4.15 IC4.16 IC4.19 IC4.20 IC4.21 IC4.22 IC4.23 IC4.24 IC4.25 IC4.26 IC4.29 IC4.30 IC4.31 IC4.32 IC4.33 IC4.34 IC4.35 IC4.36 IC4.37 IC4.38 IC4.40 IC4.41 IC4.42 IC4.43 IC4.44 IC5.4 IC5.5 IC5.6 IC5.7 IC5.8 IC5.9 IC5.11 IC5.12 IC5.13 IC5.14 IC5.15 IC5.16 IC5.17 IC5.18 IC5.19 IC5.20 R1.1
copper on no net: | length 241.1
  Top Layer w0.5: 436.592,99.323 438.163,99.323 439.259,98.227 439.283,98.203 439.283,97.973 ; 441.799,89.21 441.927,89.338 ; v1(459.198,64.826) 459.233,64.861 459.233,68.065 ; 459.233,68.865 459.283,68.815 460.416,68.815 460.849,68.382 v1(460.849,64.953) ; 459.233,69.665 460.709,69.665 461.738,68.636 461.865,68.509 v1(461.865,64.953) ; 459.233,74.465 460.582,74.465 475.516,89.399 ; 459.233,75.265 459.283,75.315 460.162,75.315 v1(463.77,78.923) ; 468.342,65.334 473.93,65.334 ; 470.501,94.036 472.88,94.036 ; 470.501,95.306 471.61,95.306 472.88,94.036 ; 475.454,91.462 472.88,94.036 ; 496.155,63.302 494.123,65.334 487.646,65.334 483.836,65.334 ; 472.88,94.036 475.708,94.036 478.883,90.861 478.883,70.287 ; 473.93,65.334 483.836,65.334 ; 473.93,65.334 474.565,65.969 474.946,66.35 478.883,70.287 ; 478.883,70.287 483.836,65.334
  Top Layer w0.8: 437.354,51.745 444.339,51.745 448.784,47.3 460.976,47.3 461.865,48.189
  Bottom Layer w0.5: v1(459.198,64.826) 459.198,55.174 463.643,50.729 468.938,50.729 469.231,50.436 469.231,49.205 ; v1(460.849,64.953) 460.849,55.047 464.278,51.618 470.755,51.618 471.771,50.602 471.771,49.205 ; v1(461.865,64.953) 461.865,55.682 464.913,52.634 472.66,52.634 474.184,51.11 474.184,49.332 474.311,49.205 ; v1(463.77,78.923) 466.31,78.923 474.849,87.462 475.454,87.462
  other v2: 432.054,43.561 498.856,43.561 432.054,103.378 498.856,103.378

## Polygon pours and split planes (outlines as drawn)
GND on Top Layer "Top Layer-No Net" (solid, pour order 2): 426.974,38.481 426.974,108.481 503.974,108.481 503.974,38.481

## Keep-outs
Bottom Layer:
  region: 426.974,105.918

## Other copper
Top Layer:
  rectangle net GND: 468.342,97.338 471.342,100.338
  rectangle net +7.4V: 461.992,97.338 464.992,100.338

## Silkscreen, mask and mechanical layers (free items; w line width, h text height)
Top Overlay:
  drawing of 2492 lines, arcs and shapes, not listed
  text "+" at 461.137,99.274 h1
  text "APHELION" at 461.865,90.226 h1.4
  text "ROKET" at 463.897,88.194 h1.3
  text "TAKIMI" at 463.643,86.289 h1.2
  text "GND,MOSI,MISO,SCK,RST" at 478.756,51.237 h1
  text "#15112018" at 489.04,48.954 h1.2 r0.66
  text "ICSP" at 479.129,48.181 h2.5
Top Solder:
  rectangle: 468.469,97.459 471.269,100.259
  rectangle: 462.068,97.452 464.868,100.252
Mechanical 1:
  the board outline again, w0.4

## Text inside footprints (layer, text, board x,y; h text height)
C4: Top Overlay "+" at 471.898,58.222 h1.5 r270
C11: Top Overlay "+" at 441.545,81.59 h1.5 r180
C12: Top Overlay "+" at 441.672,73.081 h1.5 r180